# EAGLE board Board_R2_v2 (EAGLE 7.3.0)

Size 100 x 80 mm. Coordinates in mm from the lower left corner, seen from the top.
Outline: 0,0 100,0 100,80 0,80 0,0
Copper layers (1*16): Top 0.035mm / dielectric 1.5mm / Bottom 0.035mm
Design rules "default": minimum track width 10mil, minimum drill 24mil, track to track 8mil, track to pad 8mil, pad to pad 8mil, via to via 8mil, smd to smd 8mil, copper to edge 40mil, drill to drill 8mil, minimum pad ring 10mil, minimum via ring 8mil, stop-mask expansion 4mil, vias tented up to drill 0mil, thermal gap 10mil

## Footprints (pad centres in the part's own frame; a part is rotated, then mirrored left to right if it is on the bottom)
AG9800M_SMT = smd 1.25 x 4: P$1 -11.43,-9; P$2 -8.89,-9; P$3 8.89,-9; P$4 11.43,-9; P$5 11.43,9; P$6 8.89,9; P$7 -8.89,9; P$8 -11.43,9
DFS = smd 1.2 x 1.52: + 2.54,4.369; - -2.54,4.369; ~@1 -2.54,-4.369; ~@2 2.54,-4.369
C0402K = smd 0.925 x 0.74: 1 -0.6,0; 2 0.6,0
C0603K = smd 1.05 x 1.08: 1 -0.875,0; 2 0.875,0
C0402 = smd 0.7 x 0.9: 1 -0.65,0; 2 0.65,0
C0805 = smd 1.3 x 1.5: 1 -0.95,0; 2 0.95,0
PANASONIC_E = smd 3.8 x 1.4: + 3,0; - -3,0
1206-CAP = smd 1.6 x 1.8: 1 -1.4,0; 2 1.4,0
16SVPE470M = smd 4.4 x 1.9: 1 -4.35,0; 2 4.35,0
0805 = smd 0.8 x 1.2: 1 -0.9,0; 2 0.9,0
0603-CAP = smd 1.1 x 1: 1 -0.85,0; 2 0.85,0
SMA-DIODE = smd 1.27 x 1.47: A -2.15,0; C 2.15,0
USB-A-S = smd 3 x 0.9: D+ 3.45,-1; D- 3.45,1; GND 3.45,-3; VBUS 3.45,3 | drill 2.311: P$5 0,-6.566; P$6 0,6.566
L0603 = smd 0.75 x 1.05: 1 -0.825,0; 2 0.825,0
1210 = smd 1.2 x 2: 1 -1.6,0; 2 1.6,0
CHIP-LED0805 = smd 1.2 x 1.2: A 0,-1.05; C 0,1.05
R0603 = smd 1 x 1.1: 1 -0.85,0; 2 0.85,0
R0402 = smd 0.7 x 0.9: 1 -0.65,0; 2 0.65,0
R1210 = smd 1.6 x 2.7: 1 -1.4,0; 2 1.4,0
0402-RES = smd 0.85 x 0.9: 1 -0.58,0; 2 0.58,0
RB1-125BHQ1A = drill 0.9: L1 6.325,-3.38; L2 3.785,-4.9; L3 -3.785,-3.38; L4 -6.325,-4.9; R1 -5.715,8.89; R2 -4.445,6.35; R3 -3.175,8.89; R4 -1.905,6.35; R5 -0.635,8.89; R6 0.635,6.35; R7 1.905,8.89; R8 3.175,6.35; R9 4.445,8.89; R10 5.715,6.35 | drill 1.5: S1 -7.775,3.05; S2 7.775,3.05 | hole 3.25: -5.715,0; 5.715,0
TP20R = smd 2 x 2: TP 0,0
EDISON_DAUGHTER = smd 1.14 x 0.2: 1 1.98,19.17; 2 4.62,19.17; 3 1.98,18.77; 4 4.62,18.77; 5 1.98,18.37; 6 4.62,18.37; 7 1.98,17.97; 8 4.62,17.97; 9 1.98,17.57; 10 4.62,17.57; 11 1.98,17.17; 12 4.62,17.17; 13 1.98,16.77; 14 4.62,16.77; 15 1.98,16.37; 16 4.62,16.37; 17 1.98,15.97; 18 4.62,15.97; 19 1.98,15.57; 20 4.62,15.57; 21 1.98,15.17; 22 4.62,15.17; 23 1.98,14.77; 24 4.62,14.77; 25 1.98,14.37; 26 4.62,14.37; 27 1.98,13.97; 28 4.62,13.97; 29 1.98,13.57; 30 4.62,13.57; 31 1.98,13.17; 32 4.62,13.17; 33 1.98,12.77; 34 4.62,12.77; 35 1.98,12.37; 36 4.62,12.37; 37 1.98,11.97; 38 4.62,11.97; 39 1.98,11.57; 40 4.62,11.57; 41 1.98,11.17; 42 4.62,11.17; 43 1.98,10.77; 44 4.62,10.77; 45 1.98,10.37; 46 4.62,10.37; 47 1.98,9.97; 48 4.62,9.97; 49 1.98,9.57; 50 4.62,9.57; 51 1.98,9.17; 52 4.62,9.17; 53 1.98,8.77; 54 4.62,8.77; 55 1.98,8.37; 56 4.62,8.37; 57 1.98,7.97; 58 4.62,7.97; 59 1.98,7.57; 60 4.62,7.57; 61 1.98,7.17; 62 4.62,7.17; 63 1.98,6.77; 64 4.62,6.77; 65 1.98,6.37; 66 4.62,6.37; 67 1.98,5.97; 68 4.62,5.97; 69 1.98,5.57; 70 4.62,5.57 | hole 2: 23.53,30.67; 2.93,1.98
QFN50P900X900X100-65N = smd 0.813 x 0.305: 1 -4.394,3.759; 2 -4.394,3.251; 3 -4.394,2.743; 4 -4.394,2.261; 5 -4.394,1.753; 6 -4.394,1.245; 7 -4.394,0.762; 8 -4.394,0.254; 9 -4.394,-0.254; 10 -4.394,-0.762; 11 -4.394,-1.245; 12 -4.394,-1.753; 13 -4.394,-2.261; 14 -4.394,-2.743; 15 -4.394,-3.251; 16 -4.394,-3.759; 33 4.394,-3.759; 34 4.394,-3.251; 35 4.394,-2.743; 36 4.394,-2.261; 37 4.394,-1.753; 38 4.394,-1.245; 39 4.394,-0.762; 40 4.394,-0.254; 41 4.394,0.254; 42 4.394,0.762; 43 4.394,1.245; 44 4.394,1.753; 45 4.394,2.261; 46 4.394,2.743; 47 4.394,3.251; 48 4.394,3.759 | smd 0.305 x 0.813: 17 -3.759,-4.394; 18 -3.251,-4.394; 19 -2.743,-4.394; 20 -2.261,-4.394; 21 -1.753,-4.394; 22 -1.245,-4.394; 23 -0.762,-4.394; 24 -0.254,-4.394; 25 0.254,-4.394; 26 0.762,-4.394; 27 1.245,-4.394; 28 1.753,-4.394; 29 2.261,-4.394; 30 2.743,-4.394; 31 3.251,-4.394; 32 3.759,-4.394; 49 3.759,4.394; 50 3.251,4.394; 51 2.743,4.394; 52 2.261,4.394; 53 1.753,4.394; 54 1.245,4.394; 55 0.762,4.394; 56 0.254,4.394; 57 -0.254,4.394; 58 -0.762,4.394; 59 -1.245,4.394; 60 -1.753,4.394; 61 -2.261,4.394; 62 -2.743,4.394; 63 -3.251,4.394; 64 -3.759,4.394 | smd 7.391 x 7.391: 65 0,0
21-0058I = smd 1.321 x 0.559: 1 -1.194,0.94; 2 -1.194,0; 3 -1.194,-0.94; 4 1.194,-0.94; 5 1.194,0; 6 1.194,0.94
DF40C-70DP-0.4(51) = smd 0.2 x 1.14 bottom: 1 6.8,1.32; 2 6.8,-1.32; 3 6.4,1.32; 4 6.4,-1.32; 5 6,1.32; 6 6,-1.32; 7 5.6,1.32; 8 5.6,-1.32; 9 5.2,1.32; 10 5.2,-1.32; 11 4.8,1.32; 12 4.8,-1.32; 13 4.4,1.32; 14 4.4,-1.32; 15 4,1.32; 16 4,-1.32; 17 3.6,1.32; 18 3.6,-1.32; 19 3.2,1.32; 20 3.2,-1.32; 21 2.8,1.32; 22 2.8,-1.32; 23 2.4,1.32; 24 2.4,-1.32; 25 2,1.32; 26 2,-1.32; 27 1.6,1.32; 28 1.6,-1.32; 29 1.2,1.32; 30 1.2,-1.32; 31 0.8,1.32; 32 0.8,-1.32; 33 0.4,1.32; 34 0.4,-1.32; 35 0,1.32; 36 0,-1.32; 37 -0.4,1.32; 38 -0.4,-1.32; 39 -0.8,1.32; 40 -0.8,-1.32; 41 -1.2,1.32; 42 -1.2,-1.32; 43 -1.6,1.32; 44 -1.6,-1.32; 45 -2,1.32; 46 -2,-1.32; 47 -2.4,1.32; 48 -2.4,-1.32; 49 -2.8,1.32; 50 -2.8,-1.32; 51 -3.2,1.32; 52 -3.2,-1.32; 53 -3.6,1.32; 54 -3.6,-1.32; 55 -4,1.32; 56 -4,-1.32; 57 -4.4,1.32; 58 -4.4,-1.32; 59 -4.8,1.32; 60 -4.8,-1.32; 61 -5.2,1.32; 62 -5.2,-1.32; 63 -5.6,1.32; 64 -5.6,-1.32; 65 -6,1.32; 66 -6,-1.32; 67 -6.4,1.32; 68 -6.4,-1.32; 69 -6.8,1.32; 70 -6.8,-1.32; NC1 7.2,1.32; NC2 7.2,-1.32; NC3 -7.2,-1.32; NC4 -7.2,1.32
MICRO-SD-SOCKET-PP = smd 0.8 x 1.5: 1 -8.94,10.7; 2 -7.84,10.3; 3 -6.74,10.7; 4 -5.64,10.9; 5 -4.54,10.7; 6 -3.44,10.9; 7 -2.34,10.7; 8 -1.24,10.7 | smd 1.8 x 1.4: CD1 -2.05,0.4; CD2 -7.75,0.4 | smd 1.4 x 1.9: GND1 -13.6,14.55; GND3 -0.45,13.55
UFDFN-20 = smd 0.2 x 1.1: 1 -1.8,-0.85 | smd 0.2 x 1: 2 -1.4,-0.9; 3 -1,-0.9; 4 -0.6,-0.9; 5 -0.2,-0.9; 6 0.2,-0.9; 7 0.6,-0.9; 8 1,-0.9; 9 1.4,-0.9; 10 1.8,-0.9; 11 1.8,0.9; 12 1.4,0.9; 13 1,0.9; 14 0.6,0.9; 15 0.2,0.9; 16 -0.2,0.9; 17 -0.6,0.9; 18 -1,0.9; 19 -1.4,0.9; 20 -1.8,0.9
WSON-8-PAD = smd 0.25 x 0.5: 1 -0.75,-0.95; 2 -0.25,-0.95; 3 0.25,-0.95; 4 0.75,-0.95; 5 0.75,0.95; 6 0.25,0.95; 7 -0.25,0.95; 8 -0.75,0.95 | smd 1.6 x 0.9: PAD 0,0
CRYSTAL-SMD-5X3 = smd 1.9 x 1.1: 1 -1.85,-1.15; 2 1.85,-1.15; 3 1.85,1.15; 4 -1.85,1.15

## Placement (x,y rotation side)
AG9805MT  [AG9800M_SMT]  50.8,20.32 0 top
B1  DF1510S  [DFS]  -81.28,-17.78 0 top  (outside the outline)
B2  DF1510S  [DFS]  -81.28,-29.21 0 top  (outside the outline)
C1  0.1  [C0402K]  -69.85,96.52 0 top  (outside the outline)
C2  0.1  [C0402K]  -73.66,96.52 0 top  (outside the outline)
C3  0.1  [C0402K]  -77.47,96.52 0 top  (outside the outline)
C4  0.1  [C0402K]  -81.28,96.52 0 top  (outside the outline)
C5  0.1  [C0402K]  -85.09,96.52 0 top  (outside the outline)
C6  0.1  [C0402K]  -15.24,101.6 0 top  (outside the outline)
C7  0.1  [C0402K]  -19.05,101.6 0 top  (outside the outline)
C8  0.1  [C0402K]  -22.86,101.6 0 top  (outside the outline)
C9  0.1  [C0402K]  -26.67,101.6 0 top  (outside the outline)
C10  0.1  [C0402K]  -39.37,96.52 0 top  (outside the outline)
C11  0.1  [C0402K]  -43.18,96.52 0 top  (outside the outline)
C12  0.1  [C0402K]  -46.99,96.52 0 top  (outside the outline)
C13  1.0  [C0402K]  -50.8,96.52 0 top  (outside the outline)
C14  0.1  [C0402K]  -54.61,96.52 0 top  (outside the outline)
C15  0.1  [C0402K]  -58.42,96.52 0 top  (outside the outline)
C16  0.1  [C0402K]  -62.23,96.52 0 top  (outside the outline)
C17  4.7  [C0603K]  -76.2,91.44 0 top  (outside the outline)
C18  0.01uF  [C0603K]  -72.39,91.44 0 top  (outside the outline)
C19  15pF  [C0402]  -81.28,80.01 0 top  (outside the outline)
C20  15pF  [C0402]  -16.51,86.36 0 top  (outside the outline)
C21  15pF  [C0402]  -22.86,86.36 0 top  (outside the outline)
C22  15pF  [C0402]  -29.21,86.36 0 top  (outside the outline)
C23  0.022uF  [C0805]  -83.82,63.5 0 top  (outside the outline)
C24  33pF  [C0402]  -35.56,86.36 0 top  (outside the outline)
C25  33pF  [C0402]  -41.91,86.36 0 top  (outside the outline)
C26  150uF  [PANASONIC_E]  -41.91,64.77 0 top  (outside the outline)
C27  1.0  [C0402K]  -66.04,96.52 0 top  (outside the outline)
C28  0.1uF  [C0402]  -62.23,80.01 0 top  (outside the outline)
C29  0.1uF  [C0402]  -68.58,80.01 0 top  (outside the outline)
C30  0.1uF  [C0402]  -74.93,80.01 0 top  (outside the outline)
C31  10uF  [1206-CAP]  -30.48,101.6 0 top  (outside the outline)
C32  470uF  [16SVPE470M]  -78.74,-6.35 0 top  (outside the outline)
C33  22uF  [0805]  -88.9,-35.56 0 top  (outside the outline)
C34  22uF  [0805]  -92.71,-35.56 0 top  (outside the outline)
C35  47pF  [0603-CAP]  -92.71,-40.64 0 top  (outside the outline)
D1  TVSSMA  [SMA-DIODE]  -33.02,96.52 0 top  (outside the outline)
JP2  USB-A-S  [USB-A-S]  -19.05,68.58 0 top  (outside the outline)
L1  2.0A 120Ohm  [L0603]  -36.83,80.01 0 top  (outside the outline)
L2  2.0A 120Ohm  [L0603]  -49.53,80.01 0 top  (outside the outline)
L3  1.0uH  [1210]  -91.44,-50.8 0 top  (outside the outline)
LED1  Green LED  [CHIP-LED0805]  -33.02,62.23 0 top  (outside the outline)
R1  10K  [R0603]  -26.67,91.44 0 top  (outside the outline)
R2  12K  [R0603]  -31.75,91.44 0 top  (outside the outline)
R3  12.4K  [R0603]  -55.88,80.01 0 top  (outside the outline)
R4  10K  [R0603]  -36.83,91.44 0 top  (outside the outline)
R5  49.9  [R0402]  -46.99,86.36 0 top  (outside the outline)
R6  49.9  [R0402]  -52.07,86.36 0 top  (outside the outline)
R7  49.9  [R0402]  -57.15,86.36 0 top  (outside the outline)
R8  49.9  [R0402]  -62.23,86.36 0 top  (outside the outline)
R9  10  [R0402]  -40.64,91.44 0 top  (outside the outline)
R10  0  [R1210]  -68.58,63.5 0 top  (outside the outline)
R11  330  [R0402]  -67.31,86.36 0 top  (outside the outline)
R12  330  [R0402]  -72.39,86.36 0 top  (outside the outline)
R13  330  [R0402]  -77.47,86.36 0 top  (outside the outline)
R14  1M  [R0402]  -82.55,86.36 0 top  (outside the outline)
R15  56k  [R0603]  -16.51,91.44 0 top  (outside the outline)
R16  680K  [0402-RES]  -91.44,-44.45 0 top  (outside the outline)
R17  10K  [R0603]  -21.59,91.44 0 top  (outside the outline)
R18  120K  [0402-RES]  -91.44,-46.99 0 top  (outside the outline)
RB1-125BHQ1A  [RB1-125BHQ1A]  20.32,20.32 0 top
TP1  TPTP20R  [TP20R]  -60.96,91.44 0 top  (outside the outline)
TP2  TPTP20R  [TP20R]  -66.04,91.44 0 top  (outside the outline)
U1  EDISON_CONNECTOR_FULLMOUNTING_HOLES  [EDISON_DAUGHTER]  -38.1,1.27 0 top  (outside the outline)
U2  LAN9512-JZX  [QFN50P900X900X100-65N]  -73.66,46.99 0 top  (outside the outline)
U3  MAX4995AAUT+  [21-0058I]  -53.34,91.44 0 top  (outside the outline)
U4  EDISON_CONNECTOR_FULLHEADER  [DF40C-70DP-0.4(51)]  -21.59,96.52 0 top  (outside the outline)
U5  USD-SOCKETNEW  [MICRO-SD-SOCKET-PP]  -45.72,38.1 0 top  (outside the outline)
U6  TXB0108  [UFDFN-20]  -16.51,80.01 0 top  (outside the outline)
U7  TPS62065  [WSON-8-PAD]  -83.82,-36.83 0 top  (outside the outline)
U$1  25MHz  [CRYSTAL-SMD-5X3]  -22.86,80.01 0 top  (outside the outline)

## Library data of the parts
AG9805MT B1 B2 C32 RB1-125BHQ1A = PoEdev
C1-C22 C24 C25 C27-C30 R15 = rcl
C23 R1-R14 R17 = resistor
C26 = SparkFun-Capacitors
C31 = SparkFun-Capacitors; PROD_ID: CAP-10300
C33 C34 = SparkFun-Capacitors; PROD_ID: CAP-08402
C35 = SparkFun-Capacitors; PROD_ID: CAP-08913
D1 = SparkFun-DiscreteSemi
JP2 = SparkFun-Connectors
L1 L2 = murata-inductors
L3 = SparkFun-Passives
LED1 = led
R16 R18 = SparkFun-Resistors
TP1 TP2 = testpad
U1 U4 = Edison
U2 = Lan9512; MPN: LAN9512-JZX; OC_FARNELL: 2292586; OC_NEWARK: 66W1988; PACKAGE: 64VQFN; SUPPLIER: Microchip
U3 = MAX4995; MANUFACTURER_PART_NUMBER: max4995aaut+; VENDOR: MAXIM
U5 = SparkFun-Connectors; PROD_ID: CONN-07820
U6 = SparkFun-DigitalIC; PROD_ID: IC-12292
U7 = SparkFun-PowerIC; PROD_ID: IC-12273
U$1 = SparkFun-FreqCtrl

## Nets
1.8V: C29.1 U1.12 U6.5 U6.6
+3V3: C1.1 C2.1 C3.1 C4.1 C5.1 C28.1 L1.1 LED1.A R1.2 R4.2 R17.2 RB1-125BHQ1A.L1 RB1-125BHQ1A.L3 U1.8 U1.10 U2.11 U2.19 U2.27 U2.28 U2.29 U2.30 U2.32 U2.33 U2.39 U2.40 U2.46 U4.8 U4.10 U5.4 U6.16
CHASSGND: R10.1 RB1-125BHQ1A.S1 RB1-125BHQ1A.S2
CLK24_OUT: TP1.TP U2.45
DSUSB_N: JP2.D- U2.1
DSUSB_P: JP2.D+ U2.2
GND: AG9805MT.P$3 C1.2 C2.2 C3.2 C4.2 C5.2 C6.2 C7.2 C8.2 C9.2 C10.2 C11.2 C12.2 C13.2 C14.2 C15.2 C16.2 C17.2 C18.2 C19.2 C20.2 C21.2 C22.2 C23.2 C24.2 C25.2 C26.- C27.2 C28.2 C29.2 C30.2 C31.2 C32.2 C33.2 C34.2 JP2.GND R2.2 R3.2 R10.2 R15.1 R18.1 TP2.TP U1.1 U1.3 U1.5 U1.9 U1.11 U1.13 U1.15 U2.34 U2.65 U3.2 U4.1 U4.5 U4.9 U4.11 U4.13 U4.15 U5.6 U5.GND1 U5.GND3 U6.15 U7.1 U7.3 U7.6 U7.PAD U$1.2 U$1.4
N$1: R17.1 U2.44
N$2: U5.1 U6.20
N$3: U2.16
N$4: U5.2 U6.19
N$5: U5.3 U6.18
N$6: R2.1 U2.63
N$7: C18.1 R1.1 U2.12
N$8: R3.1 U2.50
N$9: R4.1 U2.41
N$10: C23.1 R9.1 RB1-125BHQ1A.R3
N$11: U5.5 U6.12 U6.17
N$12: U5.7 U6.14
N$13: U5.8 U6.13
N$14: L3.1 U7.2
N$15: R11.2 U2.21
N$16: R11.1 RB1-125BHQ1A.L2
N$17: R12.1 RB1-125BHQ1A.L4
N$18: R12.2 U2.22
N$19: LED1.C R13.1
N$20: R13.2 U2.20
N$21: C24.1 R14.1 U2.61 U$1.1
N$22: C25.1 R14.2 U2.60 U$1.3
N$23: U2.14 U3.4 U3.6
N$25: C26.+ JP2.VBUS U3.1
N$26: R15.2 U3.3
N$27: B1.~@1 RB1-125BHQ1A.R10
N$28: B1.~@2 RB1-125BHQ1A.R9
N$29: B2.~@1 RB1-125BHQ1A.R7
N$30: B2.~@2 RB1-125BHQ1A.R8
N$31: AG9805MT.P$5 AG9805MT.P$6 B1.+ B2.+ D1.C
N$32: C35.2 R16.1 R18.2 U7.4
N$33: AG9805MT.P$7 AG9805MT.P$8 B1.- B2.- D1.A
P2: U4.2
P3: U4.3
P4: U1.4 U4.4
P6: U1.6 U4.6
P7: U1.7 U4.7
P12: U4.12
P14: U1.14 U4.14
P17: U1.17 U4.17
P19: U1.19 U4.19
P21: U1.21 U4.21
P22: U1.22 U4.22
P23: U1.23 U4.23
P24: U1.24 U4.24
P25: U1.25 U4.25
P26: U1.26 U4.26
P27: U1.27 U4.27
P28: U1.28 U4.28
P30: U1.30 U4.30
P31: U1.31 U4.31
P32: U1.32 U4.32
P33: U1.33 U4.33
P34: U1.34 U4.34
P35: U1.35 U4.35
P36: U1.36 U4.36
P37: U1.37 U4.37
P39: U1.39 U4.39
P41: U1.41 U4.41
P42: U1.42 U4.42
P43: U1.43 U4.43
P45: U1.45 U4.45
P46: U1.46 U4.46
P47: U1.47 U4.47
P48: U1.48 U4.48
P50: U1.50 U4.50
P51: U1.51 U4.51
P52: U1.52 U4.52
P53: U1.53 U4.53
P54: U1.54 U4.54
P55: U1.55 U4.55
P56: U1.56 U4.56
P57: U1.57 U4.57
P59: U1.59 U4.59
P61: U1.61 U4.61
P63: U1.63 U4.63
P65: U1.65 U4.65
P67: U1.67 U4.67
P69: U1.69 U4.69
RX_N: C22.1 R8.1 RB1-125BHQ1A.R1 U2.52
RX_P: C21.1 R7.1 RB1-125BHQ1A.R2 U2.53
SDCD: U1.60 U4.60 U5.CD1
SDCLK: U1.58 U4.58 U6.4
SDCLKFB: U1.44 U4.44 U6.9
SDCMD: U1.62 U4.62 U6.3
SDDAT0: U1.66 U4.66 U6.7
SDDAT1: U1.70 U4.70 U6.8
SDDAT2: U1.64 U4.64 U6.1
SDDAT3: U1.68 U4.68 U6.2
TX_N: C19.1 R5.1 RB1-125BHQ1A.R4 U2.56
TX_P: C20.1 R6.1 RB1-125BHQ1A.R5 U2.55
USB_UP_N: U1.18 U2.58
USB_UP_P: U1.16 U2.59
USB_VBUS: AG9805MT.P$1 AG9805MT.P$2 C27.1 C30.1 C31.1 C32.1 C33.1 U1.20 U3.5 U4.20 U7.5 U7.7 U7.8
USBUP: U4.16
USBUP2: U4.18
VDD18CORE: C15.1 C16.1 C17.1 U2.15 U2.38
VDD18ETHPLL: C14.1 L2.2 U2.48
VDD18USBPLL: C13.1 L2.1 U2.62
VDD33A: C6.1 C7.1 C8.1 C9.1 C10.1 C11.1 C12.1 L1.2 R5.2 R6.2 R7.2 R8.2 R9.2 U2.5 U2.10 U2.49 U2.51 U2.54 U2.57 U2.64
VSYS: C34.1 C35.1 L3.2 R16.2 U1.2

## Tracks (layer width: path | path; a pad name or v marks a point on that pad's centre or on a via)
1.8V  (3 unrouted)
+3V3  (29 unrouted)
CHASSGND  (2 unrouted)
CLK24_OUT  (1 unrouted)
DSUSB_N  (1 unrouted)
DSUSB_P  (1 unrouted)
GND  (67 unrouted)
N$1  (1 unrouted)
N$2  (1 unrouted)
N$4  (1 unrouted)
N$5  (1 unrouted)
N$6  (1 unrouted)
N$7  (2 unrouted)
N$8  (1 unrouted)
N$9  (1 unrouted)
N$10  (2 unrouted)
N$11  (2 unrouted)
N$12  (1 unrouted)
N$13  (1 unrouted)
N$14  (1 unrouted)
N$15  (1 unrouted)
N$16  (1 unrouted)
N$17  (1 unrouted)
N$18  (1 unrouted)
N$19  (1 unrouted)
N$20  (1 unrouted)
N$21  (3 unrouted)
N$22  (3 unrouted)
N$23  (2 unrouted)
N$25  (2 unrouted)
N$26  (1 unrouted)
N$27  (1 unrouted)
N$28  (1 unrouted)
N$29  (1 unrouted)
N$30  (1 unrouted)
N$31  (4 unrouted)
N$32  (3 unrouted)
N$33  (4 unrouted)
P4  (1 unrouted)
P6  (1 unrouted)
P7  (1 unrouted)
P14  (1 unrouted)
P17  (1 unrouted)
P19  (1 unrouted)
P21  (1 unrouted)
P22  (1 unrouted)
P23  (1 unrouted)
P24  (1 unrouted)
P25  (1 unrouted)
P26  (1 unrouted)
P27  (1 unrouted)
P28  (1 unrouted)
P30  (1 unrouted)
P31  (1 unrouted)
P32  (1 unrouted)
P33  (1 unrouted)
P34  (1 unrouted)
P35  (1 unrouted)
P36  (1 unrouted)
P37  (1 unrouted)
P39  (1 unrouted)
P41  (1 unrouted)
P42  (1 unrouted)
P43  (1 unrouted)
P45  (1 unrouted)
P46  (1 unrouted)
P47  (1 unrouted)
P48  (1 unrouted)
P50  (1 unrouted)
P51  (1 unrouted)
P52  (1 unrouted)
P53  (1 unrouted)
P54  (1 unrouted)
P55  (1 unrouted)
P56  (1 unrouted)
P57  (1 unrouted)
P59  (1 unrouted)
P61  (1 unrouted)
P63  (1 unrouted)
P65  (1 unrouted)
P67  (1 unrouted)
P69  (1 unrouted)
RX_N  (3 unrouted)
RX_P  (3 unrouted)
SDCD  (2 unrouted)
SDCLK  (2 unrouted)
SDCLKFB  (2 unrouted)
SDCMD  (2 unrouted)
SDDAT0  (2 unrouted)
SDDAT1  (2 unrouted)
SDDAT2  (2 unrouted)
SDDAT3  (2 unrouted)
TX_N  (3 unrouted)
TX_P  (3 unrouted)
USB_UP_N  (1 unrouted)
USB_UP_P  (1 unrouted)
USB_VBUS  (12 unrouted)
VDD18CORE  (4 unrouted)
VDD18ETHPLL  (2 unrouted)
VDD18USBPLL  (2 unrouted)
VDD33A  (19 unrouted)
VSYS  (4 unrouted)